# Altium PCB Power_Embedded_Board.PcbDoc (part 2 of 3)
Units mil, origin at the board's own origin, x right, y up, seen from the top; angles counter-clockwise.
Board outline 8055 x 2985 mil, 4 copper layers (Top Layer, Ground, Battery Voltage, Bottom Layer), stack 30.634 mil thick; 155 components, 174 nets, 698 pads, 170 vias.
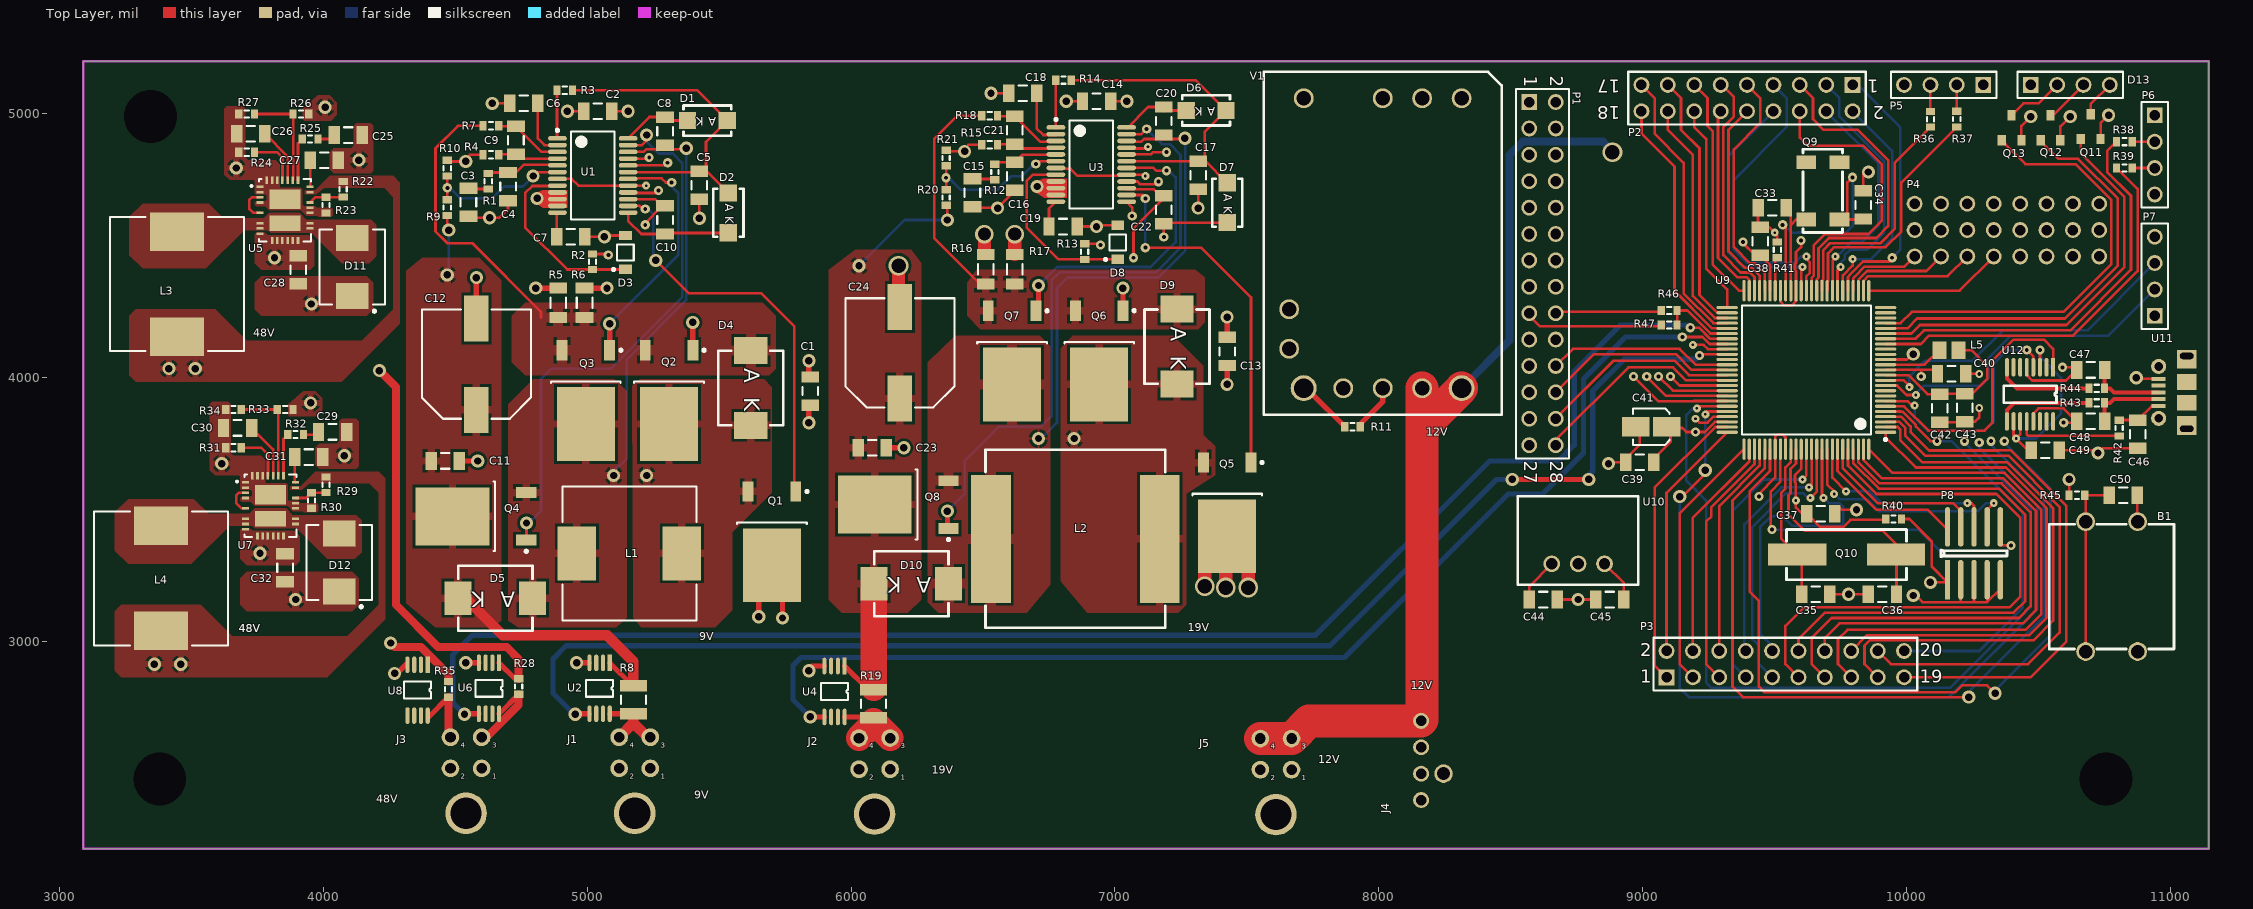
[diagram p0: Top Layer view]

## Part data (continued)
P8: library part "JTAG Header", "CONN HEADER 10POS DUAL .05\" SMD", Datasheet=http://suddendocs.samtec.com/catalog_english/ftsh_smt.pdf, Digikey Link=https://www.digikey.com/product-detail/en/samtec-inc/FTSH-105-01-L-DV-K-TR/SAM13165CT-ND/8827920, Drawings=http://suddendocs.samtec.com/prints/ftsh-1xx-xx-xxx-dv-xxx-xxx-mkt.pdf
Q1 Q2 Q3 Q4 Q5 Q6 Q7 Q8: "N-Channel TrenchMOS Intermediate Level FET, 40 V, 50 A, 3-Pin SOT428, Tape and Reel", Manufacturer="NXP Semiconductors", PartNumber=BUK6212-40C,118, Supplier Part Number 1=568-6983-2-ND, Automotive Qualified=Y, Channel Type=N, Code_JEDEC=TO-252, Code_JEITA=SC-63, ComponentLink1Description="Manufacturer URL", ComponentLink1URL=http://www.nxp.com/, ComponentLink2Description=Datasheet, ComponentLink2URL=http://www.nxp.com/documents/data_sheet/BUK6212-40C.pdf, ComponentLink3Description="Package Specification", ComponentLink3URL=http://www.nxp.com/documents/outline_drawing/sot428_po.pdf, DatasheetVersion="Rev. 2", ID [max] (A)=50, IDM [max] (A)=233, Mounting Technology="Surface Mount", PackageDescription="3-Pin Plastic Single-ended Surface Mounted Package, Body 6.1 x 6.6 mm, Pitch 2.285 mm", PackageReference=SOT428, PackageVersion="14-06-10, 06/2014", Packing="Tape & Reel", Qr [typ] (nC)=38, Supplier 1=Digi-Key, Supplier 2=Digi-Key, Supplier 3=Digi-Key, Supplier 4=Mouser, Supplier Part Number 2=568-6983-1-ND, Supplier Part Number 3=568-6983-6-ND, Supplier Part Number 4=771-BUK621240C118, VDS [max] (V)=40, VGSth [typ] (V)=2.3
Q9: "32.768 kHz Low Frequency SMD Crystal", Datasheet=https://abracon.com/Resonators/abs25.pdf
Q10: "SMD Low Profile Crystal - 3.579545 MHz to 75 MHz", Datasheet=https://abracon.com/Resonators/abls.pdf
Q11 Q12 Q13: "12V N-Channel Enhancement Mode MOSFET", Datasheet=https://www.diodes.com/assets/Datasheets/DMN1019USN.pdf
R1 R2 R3 R4 R5 R6 R7 R8 R9 R10 R11 R12 R13 R14 R15 R16 R17 R18 R19 R20 R21 R22 R23 R24 R25 R26 R27 R28 R29 R30 R31 R32 R33 R34 R35 R36 R37 R38 R39 R40 R41 R42 R43 R44 R45 R46 R47: "Resistor", Published=8-Jun-2000, Publisher="Altium Limited"
  R1 R2 R3 R4 R5 R6 R7 R8 R9 R10 R11 R12 R13 R14 R15 R16 R17 R18 R19 R20 R21 R22 R23 R24 R25 R26 R27 R28 R29 R30 R31 R32 R33 R34 R35 R36 R37 R38 R39 R40 R41 R42 R43 R44 R45: LatestRevisionDate=29-May-2009, LatestRevisionNote="IPC-7351 Footprint Added.", PackageDescription="Chip Resistor", PackageReference=J1-0603
  R46 R47: LatestRevisionDate=17-Jul-2002, LatestRevisionNote="Re-released for DXP Platform.", PackageDescription="Axial Device, Thru-Hole; 2 Leads; 0.3 in Pin Spacing", PackageReference=AXIAL-0.3
U1 U3: "Buck-boost Controller, Constant Frequency, Current Mode Control with Power Good Output, 24-pin SOP (G-24), -40 to 85 degC, Pb-Free", Frequency Sync Range="200kHz - 400kHz", Manufacturer="Linear Technology", Supplier Part Number 1=LTC3780EG#PBF-ND, ComponentLink1Description="Manufacturer URL", ComponentLink1URL=http://www.linear.com/, ComponentLink2Description=Datasheet, ComponentLink2URL=http://cds.linear.com/docs/en/datasheet/3780ff.pdf, ComponentLink3Description="Package Specification", ComponentLink3URL=http://cds.linear.com/docs/en/packaging/SSOP_24_05-08-1640.pdf, DatasheetVersion="Rev. F", Mounting Technology="Surface Mount", Number of Outputs=1, PackageDescription="24-Pin Plastic SSOP, Body 8.2 x 5.3 mm, Pitch 0.65 mm", PackageReference=G-24, PackageVersion=Jun-10, PartNumber=LTC3780EG#PBF, RoHS=TRUE, Supplier 1=Digi-Key, Supplier 2=Farnell, Supplier 3=Newark, Supplier Part Number 2=1273545, Supplier Part Number 3=56M8395
U2 U4 U6 U8: "High Resolution, Zero-Drift  Current Shunt Monitor", Datasheet=https://www.analog.com/media/en/technical-documentation/data-sheets/AD8217.pdf
U5 U7: "High Input Voltage, Boost, Flyback, SEPIC and Inverting Converter, 36-pin QFN (UHE-36-UHE28MA), -40 to 125 degC, Pb-Free", Frequency Adjust Range="100kHz - 1MHz", Manufacturer="Linear Technology", Supplier Part Number 1=LT3958EUHE#PBF-ND, ComponentLink1Description="Manufacturer URL", ComponentLink1URL=http://www.linear.com/, ComponentLink2Description=Datasheet, ComponentLink2URL=http://cds.linear.com/docs/en/datasheet/3958f.pdf, ComponentLink3Description="Package Specification", ComponentLink3URL=http://cds.linear.com/docs/en/packaging/QFN_28_05-08-1836.pdf, Mounting Technology="Surface Mount", Number of Outputs=1, PackageDescription="28-Pin Plastic QFN, Body 5 x 6 mm, Pitch 0.5 mm", PackageReference=UHE-36, PackageVersion="Rev. D, 02/2012", PartNumber=LT3958EUHE#PBF, RoHS=TRUE, Supplier 1=Digi-Key, Supplier 2=Farnell, Supplier 3=Newark, Supplier Part Number 2=2294964, Supplier Part Number 3=78R8466
U9: library part MS432P401R-IPZR, "SimpleLink Ultra-Low-Power 32-Bit ARM Cortex-M4F MCU With Precision ADC, 256KB Flash and 64KB RAM", Manufacturer="Texas Instruments", PartNumber=XMS432P401RIPZR, CompType=IC, MountType=SMT, PackageReference=PZ0100A, PIN_COUNT=100, RefDes=RefDes, TYPE=TYPE
U10: library part R-78Exx-1.0, "1A DC/DC Voltage Converter", Datasheet=https://www.recom-power.com/pdf/Innoline/R-78Exx-0.5.pdf
U11: "USB - micro B USB 2.0 Receptacle Connector 5 Position Surface Mount, Right Angle", Datasheet=https://www.molex.com/pdm_docs/sd/1050170001_sd.pdf, Digikey=https://www.digikey.com/product-detail/en/molex-llc/1050170001/WM1399CT-ND/2350885
U12: library part "FTDI FT230x", "USB to Basic UART IC", Datasheet=https://www.ftdichip.com/Support/Documents/DataSheets/ICs/DS_FT230X.pdf
V1: "12V 250W DC/DC Converter - Input 9V to 53V - Output 3.3V to 15V @ 20A", Datasheet=https://www.us.tdk-lambda.com/ftp/specs/i6a4w_datasheet.pdf, Digikey=https://www.digikey.com/product-detail/en/tdk-lambda-americas-inc/I6A4W020A033V-003-R/285-2669-ND/6605122

## Free pads (board coordinates)
  round 0 hole 200 unplated: 0(3345,4990) 0(3380,2480) 0(10755,2480)

## Via types
v1: diameter 50, hole 28, Top Layer to Bottom Layer, 89 vias
v2: diameter 35, hole 15, Top Layer to Bottom Layer, 45 vias
v3: diameter 30, hole 10, Top Layer to Bottom Layer, 26 vias
v4: diameter 75, hole 55, Top Layer to Bottom Layer, 5 vias
v5: diameter 30, hole 15, Top Layer to Bottom Layer, 2 vias
v6: diameter 70, hole 50, Top Layer to Bottom Layer, 2 vias
v7: diameter 34, hole 14, Top Layer to Bottom Layer, 1 vias

## Nets (pads, with @x,y where several pads share a name; then routed paths per layer and width w, separated by ;. In a path a pad name is that pad's centre, name@x,y a point inside that pad or via, vN(x,y) a via of type N, cw(c..) or ccw(c..) an arc to the next point about the centre after c; other vN are vias at no path point)
3V3: C39.1 C40.1 C41.1 C45.2 P4.2 P4.5 P4.8 P4.11 P4.14 P4.17 P4.20 P4.23 P7.1 P8.1 R40.2 R45.2 U9.13 U9.73 U10.3 | length 1246.9
  Top Layer w10: U10.3@8855,3295 8928.15,3221.85 C45.2@8928.15,3160 ; C39.1@9028.15,3680 9105,3756.85 9105,3810 9150,3810 9165,3795 v2(9200,3795) 9235,3795 9273.15,3833.15 U9.73@9319.8,3833.15 ; U9.13@9920.2,4030 10055,4030 ; R40.2@9980,3465 10010,3465 10095,3380 10095,3285 10155,3225 v1(10090,3225) ; v2(10055,4005) 10055,4030 ; C40.1@10116.85,4015 10101.85,4030 10055,4030 ; R45.2@10615.47,3555 v1(10615.47,3615)
9V: J1.3 J1.4 R8.2 U2.8 | length 287
  Top Layer w10: R8.2@5174.76,2727.09 R8.2@5175,2726.85 ; J1.3@5229.06,2638.19 J1.3@5239.06,2638.19
  Top Layer w20: U2.8@5085.59,2727.09 R8.2@5174.76,2727.09
  Top Layer w40: J1.4@5120.94,2638.19 5175,2692.24 ; R8.2@5175,2726.85 5175,2692.24 ; J1.3@5229.06,2638.19 5175,2692.24

## Text inside footprints (layer, text, board x,y; h text height)
D10: Top Overlay "K" at 6192.83,3244.61 h60 r180; Top Overlay "A" at 6303.07,3244.61 h60 r180
J1: Top Overlay "1" at 5278.43,2480.71 h19.68; Top Overlay "2" at 5160.31,2480.71 h19.68; Top Overlay "4" at 5160.31,2598.82 h19.68; Top Overlay "3" at 5278.43,2598.82 h19.68
J2: Top Overlay "1" at 6187.48,2477.52 h19.68; Top Overlay "2" at 6069.37,2477.52 h19.68; Top Overlay "4" at 6069.37,2595.63 h19.68; Top Overlay "3" at 6187.48,2595.63 h19.68
J3: Top Overlay "1" at 4639.37,2480.63 h19.68; Top Overlay "2" at 4521.26,2480.63 h19.68; Top Overlay "4" at 4521.26,2598.74 h19.68; Top Overlay "3" at 4639.37,2598.74 h19.68
J5: Top Overlay "1" at 7708.43,2475.71 h19.68; Top Overlay "2" at 7590.31,2475.71 h19.68; Top Overlay "4" at 7590.31,2593.82 h19.68; Top Overlay "3" at 7708.43,2593.82 h19.68
P1: Top Overlay "28" at 8650,3685 h50 r270; Top Overlay "27" at 8550,3685 h50 r270; Top Overlay "1" at 8550,5145 h50 r270; Top Overlay "2" at 8650,5145 h50 r270
P2: Top Overlay "2" at 9915,5030 h50 r180; Top Overlay "1" at 9895,5130 h50 r180; Top Overlay "17" at 8915,5130 h50 r180; Top Overlay "18" at 8915,5030 h50 r180
P3: Top Overlay "2" at 8990,2945 h50; Top Overlay "1" at 8990,2845 h50; Top Overlay "19" at 10050,2845 h50; Top Overlay "20" at 10050,2945 h50